# Altium PCB Mechanical-Keyboard.PcbDoc
Units mil, origin at the board's own origin, x right, y up, seen from the top; angles counter-clockwise.
Board outline 3009 x 4437 mil, 2 copper layers (Top Layer, Bottom Layer), stack 44.685 mil thick; 52 components, 40 nets, 184 pads, 253 vias.
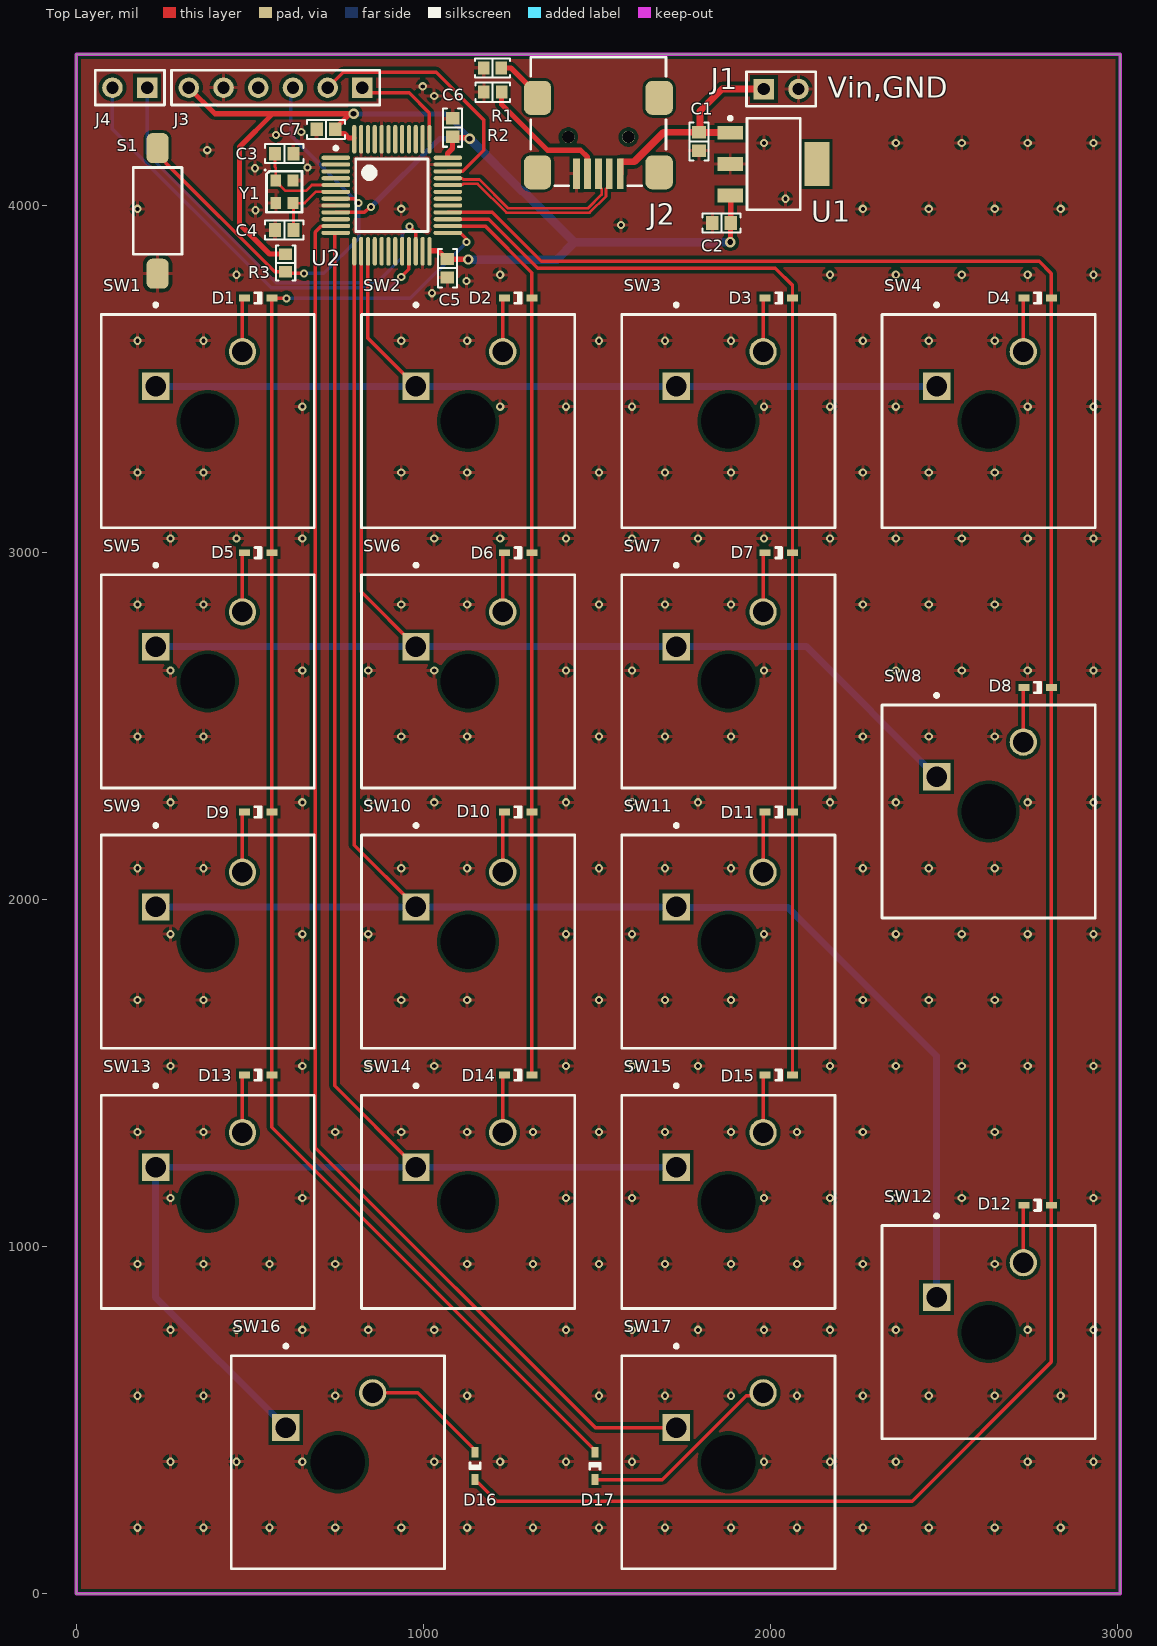
[diagram p0: Top Layer view]
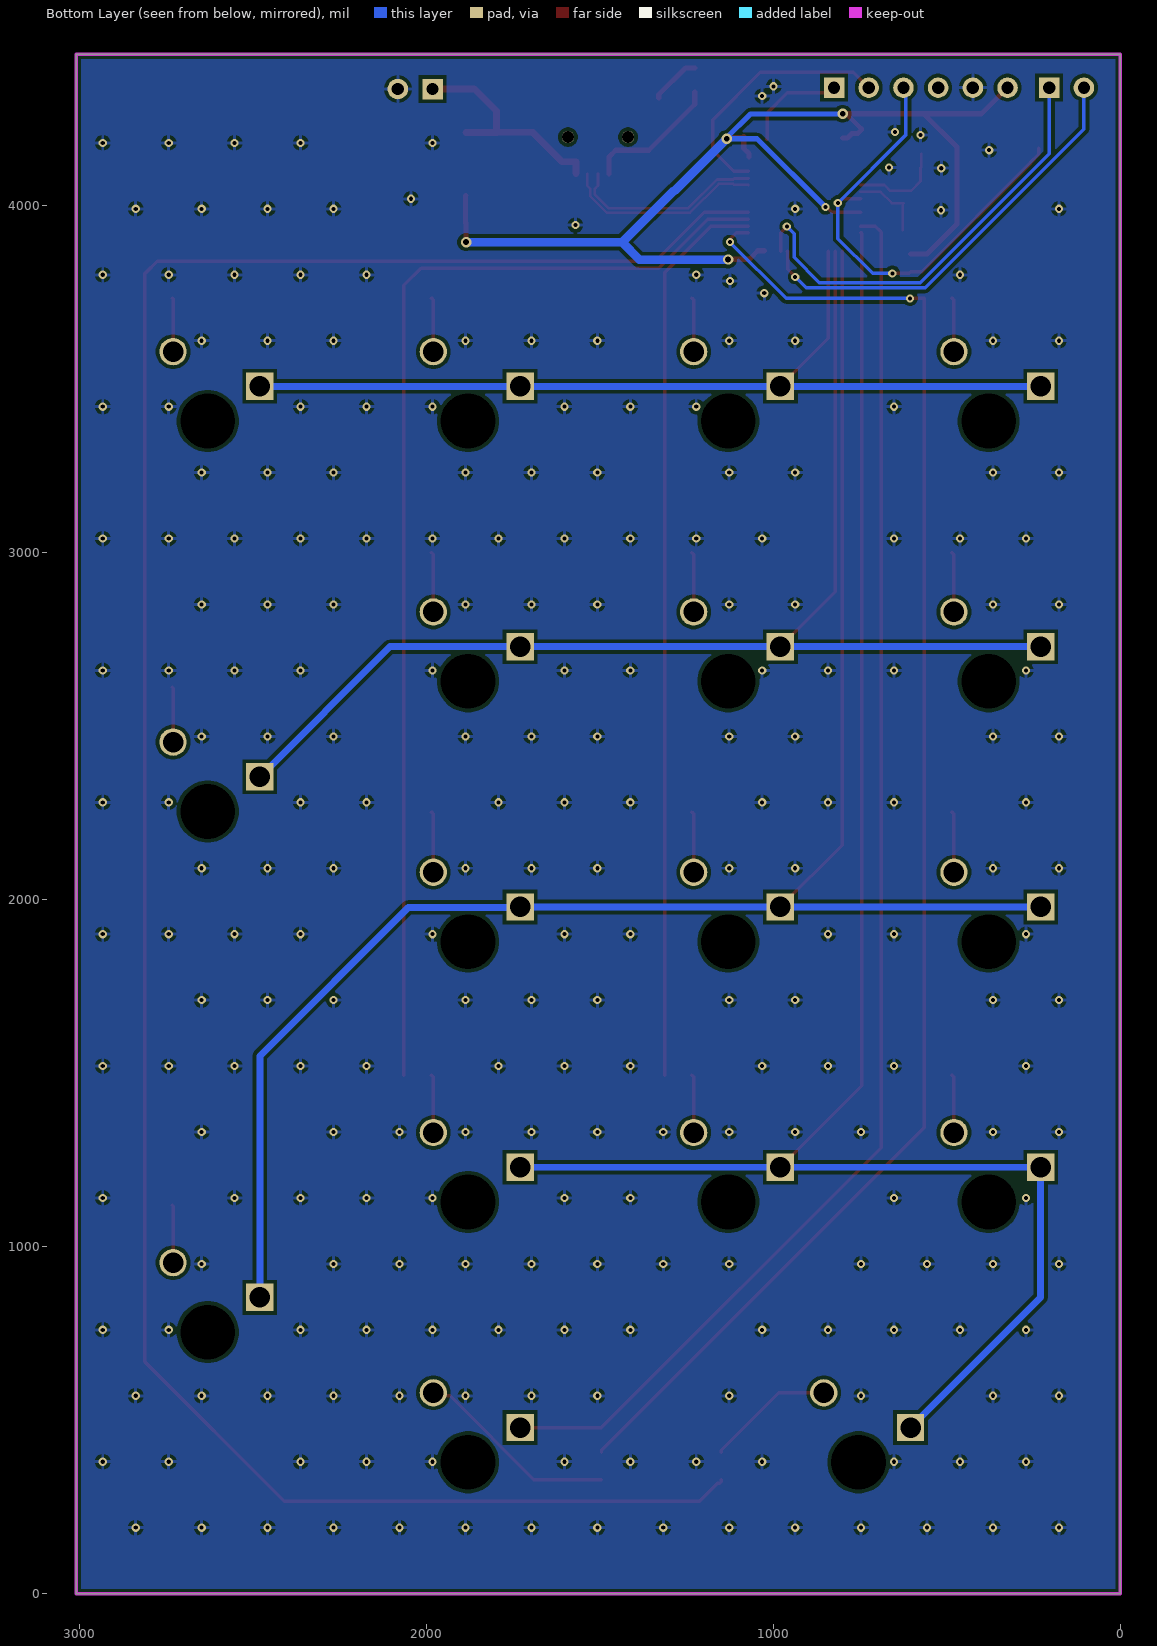
[diagram p1: Bottom Layer view, seen from below]
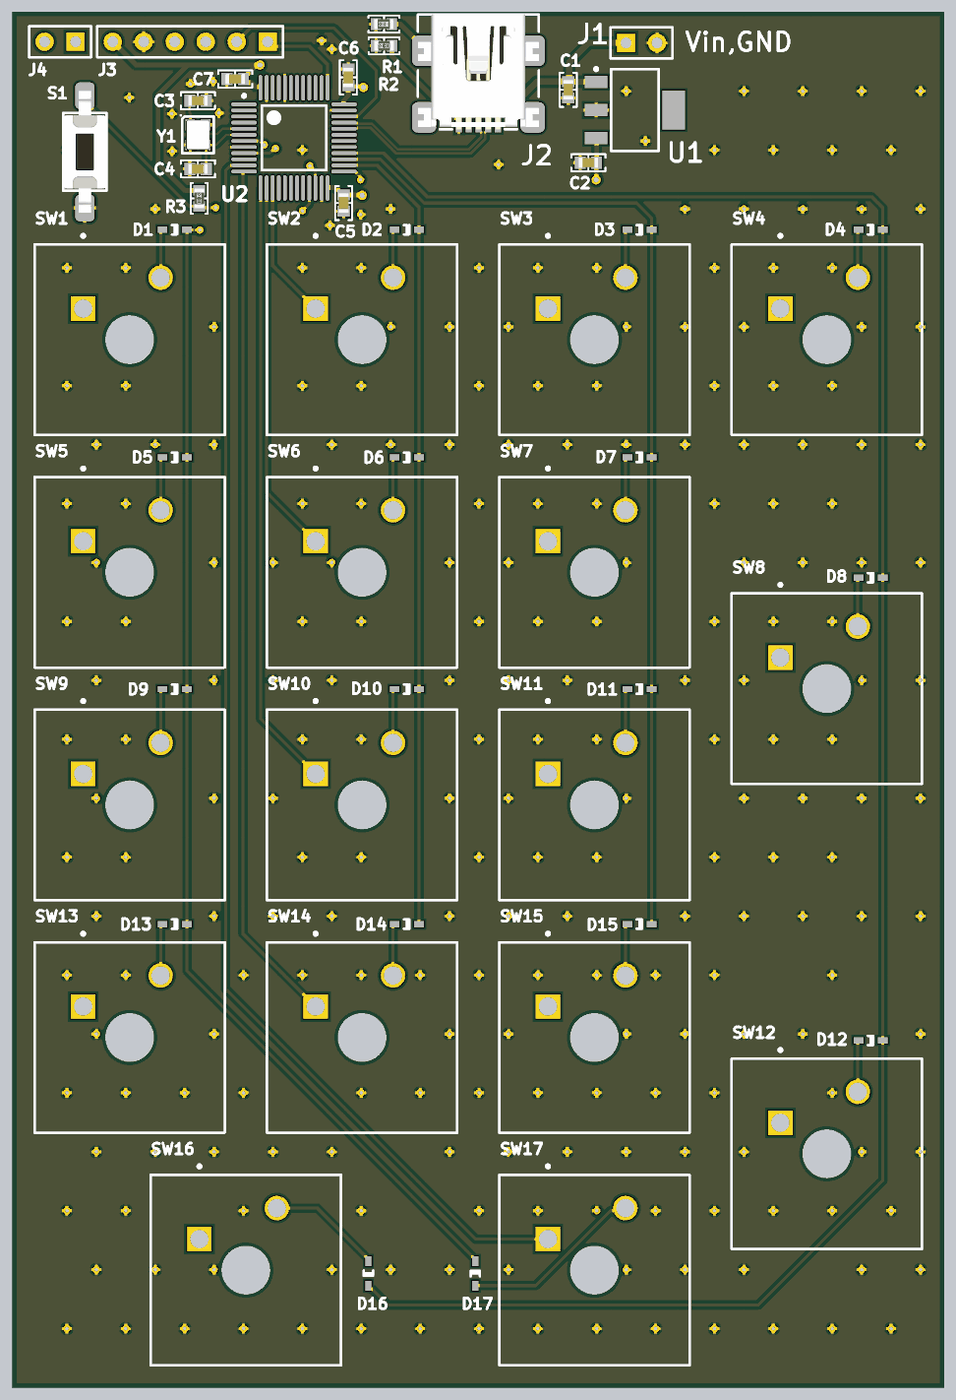
[diagram p2: 3D render of the assembled board from above, using the file's embedded part models]

## Layer stack, top to bottom
Top Solder: solder mask 0.8, Solder Resist, Dk 3.8
Top Layer: signal copper 1.378
Dielectric 1: dielectric 41.929, FR-4, Dk 4.8
Bottom Layer: signal copper 1.378
Bottom Solder: solder mask 0.8, Solder Resist, Dk 3.8

## Board outline
0,0 3009,0 3009,4437 0,4437

## Design rules (kind name [scope] priority, off if disabled: settings)
Clearance [All] p1: gap=10 ignorepadtopadclearanceinfootprint=FALSE except(0: Arc-Hole Track-Hole SMDPad-Hole THPad-Hole Via-Hole Fill-Hole Poly-Hole Region-Hole Text-Hole; 5: Arc-Arc Arc-Track Track-Track SMDPad-SMDPad; 7.87: Arc-SMDPad Track-SMDPad SMDPad-Fill SMDPad-Poly SMDPad-Region)
DiffPairsRouting USB_PHY [InDifferentialPairClass('USB_PHY')] p1: maxlimit=5 minlimit=5 mostfreqgap=5 toplayer_minwidth=7.71 toplayer_maxwidth=7.71 toplayer_prefwidth=7.71 bottomlayer_minwidth=7.71 bottomlayer_maxwidth=7.71 bottomlayer_prefwidth=7.71 impedanceprofiledriven=TRUE impedanceprofileid={DAAED7B1-7A43-4DDA-B76B-991709989FBB} maxuncoupledlength=500
DiffPairsRouting [All] p2: maxlimit=10 minlimit=10 mostfreqgap=10 toplayer_minwidth=4 toplayer_maxwidth=15 toplayer_prefwidth=15 bottomlayer_minwidth=4 bottomlayer_maxwidth=15 bottomlayer_prefwidth=15 maxuncoupledlength=500
PolygonConnect [All] p1: connectstyle=Relief reliefconductorwidth=10 reliefentries=4 polygonreliefangle="90 Angle" airgapwidth=10
RoutingVias [All] p1: holewidth=7.89 width=15.76 viastyle="Through Hole" minholewidth=7.87 minwidth=15.76 maxholewidth=28 maxwidth=50
SilkToSolderMaskClearance [IsPad] p1: minsilkscreentomaskgap=5.91 clearancetoexposedcopper=TRUE
SolderMaskExpansion [All] p1: expansion=4 istentingtop=FALSE
Width Microstrip [InNetClass('RF')] p1: maxlimit=11.6 minlimit=11.6 preferedwidth=11.6 impedanceprofiledriven=TRUE impedanceprofileid={7D405859-9D58-4392-8E80-BA888CAD5812} minimp=50.000000 maximp=50.000000 favimp=50.000000
Width [All] p2: maxlimit=30 minlimit=4 preferedwidth=15 toplayer_prefwidth=10 minimp=50.000000 maximp=50.000000 favimp=50.000000
28 further rules are at their usual default settings.

## Classes and differential pairs
differential pair class USB_PHY: USB_D
component class U_Power: C1 C2 U1
component class U_MCU: C3 C4 C5 C6 C7 R3 S1 U2 Y1
component class U_Key-Matrix: D1 D2 D3 D4 D5 D6 D7 D8 D9 D10 D11 D12 D13 D14 D15 D16 D17 SW1 SW2 SW3 SW4 SW5 SW6 SW7 SW8 SW9 SW10 SW11 SW12 SW13 SW14 SW15 SW16 SW17
component class Mechanical-Keyboard: J1 J2 J3 J4 R1 R2
differential pair USB_D: +USB_D_P -USB_D_N

## Components (designator, comment, footprint, x,y, rotation, side; value= is the part's Value field where it differs from the comment)
C1 "1uF" "CAP 0603_1608" 1795,4185 r90 top
C2 "1uF" "CAP 0603_1608" 1860,3950 r0 top
C3 "4pF" "CAP 0603_1608" 600,4150 r180 top
C4 "4pF" "CAP 0603_1608" 600,3930 r0 top
C5 "100nF" "CAP 0603_1608" 1070,3820 r90 top
C6 "100nF" "CAP 0603_1608" 1085,4225 r270 top
C7 "100nF" "CAP 0603_1608" 720,4220 r0 top
D1 "1N4148WT" FAIR-SOD-523F-2_V 525,3734 r180 top
D2 "1N4148WT" FAIR-SOD-523F-2_V 1274,3734 r180 top
D3 "1N4148WT" FAIR-SOD-523F-2_V 2025,3734 r180 top
D4 "1N4148WT" FAIR-SOD-523F-2_V 2771,3734 r180 top
D5 "1N4148WT" FAIR-SOD-523F-2_V 525,3000 r180 top
D6 "1N4148WT" FAIR-SOD-523F-2_V 1274,3000 r180 top
D7 "1N4148WT" FAIR-SOD-523F-2_V 2025,3000 r180 top
D8 "1N4148WT" FAIR-SOD-523F-2_V 2771,2612 r180 top
D9 "1N4148WT" FAIR-SOD-523F-2_V 525,2253 r180 top
D10 "1N4148WT" FAIR-SOD-523F-2_V 1274,2253 r180 top
D11 "1N4148WT" FAIR-SOD-523F-2_V 2025,2253 r180 top
D12 "1N4148WT" FAIR-SOD-523F-2_V 2771,1120 r180 top
D13 "1N4148WT" FAIR-SOD-523F-2_V 525,1495 r180 top
D14 "1N4148WT" FAIR-SOD-523F-2_V 1274,1495 r180 top
D15 "1N4148WT" FAIR-SOD-523F-2_V 2025,1495 r180 top
D16 "1N4148WT" FAIR-SOD-523F-2_V 1150,369 r90 top
D17 "1N4148WT" FAIR-SOD-523F-2_V 1495,369 r270 top
J1 "2 Pin" HDR1X2 1981.69,4336.26 r0 top
J2 "USB Micro" "FCI USB 10033526-N3212LF" 1505,4243 r0 top locked
J3 "6 Pin" HDR1X6 825,4340 r180 top
J4 "2 Pin" HDR1X2 205,4340 r180 top
R1 "DNP" "RES 0603_1608" 1200.59,4327 r180 top
R2 "DNP" "RES 0603_1608" 1200,4397 r180 top
R3 "10k" "RES 0603_1608" 604,3835 r90 top
S1 "SPST-NO" "TE FSMSMTR" 235,3985 r0 top
SW1 "MX1A-11NN" CHRY-MX1A-11NN_V 379.51,3379.51 r0 top locked
SW2 "MX1A-11NN" CHRY-MX1A-11NN_V 1129.51,3379.51 r0 top locked
SW3 "MX1A-11NN" CHRY-MX1A-11NN_V 1879.51,3379.51 r0 top locked
SW4 "MX1A-11NN" CHRY-MX1A-11NN_V 2629.51,3379.51 r0 top locked
SW5 "MX1A-11NN" CHRY-MX1A-11NN_V 379.51,2629.51 r0 top locked
SW6 "MX1A-11NN" CHRY-MX1A-11NN_V 1129.51,2629.51 r0 top locked
SW7 "MX1A-11NN" CHRY-MX1A-11NN_V 1879.51,2629.51 r0 top locked
SW8 "MX1A-11NN" CHRY-MX1A-11NN_V 2629.51,2254.51 r0 top locked
SW9 "MX1A-11NN" CHRY-MX1A-11NN_V 379.51,1879.51 r0 top locked
SW10 "MX1A-11NN" CHRY-MX1A-11NN_V 1129.51,1879.51 r0 top locked
SW11 "MX1A-11NN" CHRY-MX1A-11NN_V 1879.51,1879.51 r0 top locked
SW12 "MX1A-11NN" CHRY-MX1A-11NN_V 2629.51,754.51 r0 top locked
SW13 "MX1A-11NN" CHRY-MX1A-11NN_V 379.51,1129.51 r0 top locked
SW14 "MX1A-11NN" CHRY-MX1A-11NN_V 1129.51,1129.51 r0 top
SW15 "MX1A-11NN" CHRY-MX1A-11NN_V 1879.51,1129.51 r0 top locked
SW16 "MX1A-11NN" CHRY-MX1A-11NN_V 754.51,379.51 r0 top locked
SW17 "MX1A-11NN" CHRY-MX1A-11NN_V 1879.51,379.51 r0 top locked
U1 "MCP1703A-3302E/DB" MCHP-SOT-223-DB3_N 2010,4120 r0 top
U2 "STM32L151C6T6" STM-LQFP48_M 910,4030 r0 top
Y1 "24MHz" "ABRACON ABM10" 600,4040 r270 top

## Footprints (in the part's own frame and the unit in brackets; to place one, negate y for a bottom-side part, rotate by r counter-clockwise, add the part's x,y. Pads: shape width x height; smd on the part's side, far side on the other; paste and mask are expansions set on the pad)
"ABRACON ABM10" [mm] "Crystal, 4-Leads, Body 2.00x2.45mm, Pitch 1.65mm, IPC Medium Density"
  rect 0.9x0.8 smd: 1(-0.825,-0.625) 2(0.825,-0.625) 3(0.825,0.625) 4(-0.825,0.625)
  silkscreen extent -1.65,-1.45 1.5,1.3, body extent -1.27,-1.02 1.28,1.03, height 0.5
"CAP 0603_1608" [mm] "Chip Capacitor, 2-Leads, Body 1.60x0.80mm, IPC Medium Density"
  rect 0.9x1 smd: 1(-0.675,0) 2(0.675,0)
  silkscreen extent -1.4,-0.7 1.4,0.7, body extent -0.8,-0.41 0.8,0.41, height 0.82
CHRY-MX1A-11NN_V [mm] "Switch, 2-Leads, Body 15.6x15.6mm"
  rect 2x2 hole 1.5 paste+0: 1(-3.81,2.54)
  round 2 hole 1.5 paste+0: 2(2.54,5.08)
  round 0 hole 4 unplated paste+0: MH1(0,0)
  silkscreen extent -7.8,-7.8 7.8,8.62, body extent -7.8,-7.8 7.8,7.8, height 15.2
FAIR-SOD-523F-2_V [mm] "SMD, 2-Leads, Body 1.2x0.8mm, Height 0.7mm"
  rect 0.8x0.5 smd: 1(-1,0) 2(1,0)
  silkscreen extent -0.2,-0.38 0.24,0.38, body extent -0.6,-0.4 0.6,0.4, height 0.71
"FCI USB 10033526-N3212LF" [mm] "USB 2.0 Type B Mini"
  rect 0.5x2.25 smd: 1(1.6,-3.826) 2(0.8,-3.826) 3(0,-3.826) 4(-0.8,-3.826) 5(-1.6,-3.826)
  round 0.9 hole 0.9 unplated: M(-2.2,-1.151) M(2.2,-1.151)
  rrect50% 2x2.5 smd: S(-4.45,-3.731) S(-4.45,1.719) S(4.45,-3.731) S(4.45,1.719)
  silkscreen extent -4.95,-4.71 4.95,4.69, body extent -4.95,-4.7 4.95,4.7, height 4.01
HDR1X2 [mm] "Connector; Header; 2 Position"
  rect 1.5x1.5 hole 0.9: 1(0,0)
  round 1.5 hole 0.9: 2(2.54,0)
  silkscreen extent -1.27,-1.27 3.81,1.27
HDR1X6 [mm] "Connector; Header; 6 Position"
  rect 1.5x1.5 hole 0.9: 1(0,0)
  round 1.5 hole 0.9: 2(2.54,0) 3(5.08,0) 4(7.62,0) 5(10.16,0) 6(12.7,0)
  silkscreen extent -1.27,-1.27 13.97,1.27
MCHP-SOT-223-DB3_N [mm] "SOT223, 3-Leads, Body 6.5x3.5mm, Pitch 2.3mm, IPC Medium Density"
  rect 1.85x1 smd: 1(-3.175,2.3) 2(-3.175,0) 3(-3.175,-2.3)
  rect 1.85x3.2 smd: 4(3.175,0)
  silkscreen extent -3.3,-3.35 1.95,3.47, body extent -1.85,-3.35 1.85,3.35, height 1.8
"RES 0603_1608" [mm] "Chip Resistor, 2-Leads, Body 1.60x0.80mm, IPC Medium Density"
  rect 0.85x0.95 smd: 1(-0.65,0) 2(0.65,0)
  silkscreen extent -1.27,-0.7 1.27,0.7, body extent -0.8,-0.4 0.8,0.4, height 0.45
STM-LQFP48_M [mm] "QFP, 48-Leads, Body 7x7mm, Pitch 0.5mm, IPC Low Density"
  oval 2.1x0.3 smd: 1(-4.1,2.75) 2(-4.1,2.25) 3(-4.1,1.75) 4(-4.1,1.25) 5(-4.1,0.75) 6(-4.1,0.25) 7(-4.1,-0.25) 8(-4.1,-0.75) 9(-4.1,-1.25) 10(-4.1,-1.75) 11(-4.1,-2.25) 12(-4.1,-2.75) 25(4.1,-2.75) 26(4.1,-2.25) 27(4.1,-1.75) 28(4.1,-1.25) 29(4.1,-0.75) 30(4.1,-0.25) 31(4.1,0.25) 32(4.1,0.75) 33(4.1,1.25) 34(4.1,1.75) 35(4.1,2.25) 36(4.1,2.75)
  oval 0.3x2.1 smd: 13(-2.75,-4.1) 14(-2.25,-4.1) 15(-1.75,-4.1) 16(-1.25,-4.1) 17(-0.75,-4.1) 18(-0.25,-4.1) 19(0.25,-4.1) 20(0.75,-4.1) 21(1.25,-4.1) 22(1.75,-4.1) 23(2.25,-4.1) 24(2.75,-4.1) 37(2.75,4.1) 38(2.25,4.1) 39(1.75,4.1) 40(1.25,4.1) 41(0.75,4.1) 42(0.25,4.1) 43(-0.25,4.1) 44(-0.75,4.1) 45(-1.25,4.1) 46(-1.75,4.1) 47(-2.25,4.1) 48(-2.75,4.1)
  silkscreen extent -4.22,-2.65 2.65,3.57, body extent -3.5,-3.5 3.5,3.5, height 1.6
"TE FSMSMTR" [mm]
  rrect50% 1.6x2.19 smd: 1(0,4.595) 2(0,-4.595)
  silkscreen extent -1.78,-3.17 1.78,3.17, body extent -1.75,-4.98 1.75,4.98, height 4.42

## Part data
C1 C2 C3 C4 C5 C6 C7: library part Capacitor, "SMT Capacitor"
D1 D2 D3 D4 D5 D6 D7 D8 D9 D10 D11 D12 D13 D14 D15 D16 D17: library part CMP-0881-00001-1, "High Conductance Fast Switching Diode, 75 V, -55 to 150 degC, 2-Pin SOD523F, RoHS", Manufacturer="Fairchild Semiconductor", Temperature Range="-55 to 150 degC", BVR (IR="5 uA)=75 V Min.", CO="4 pF Max.", ComponentLink1Description="Manufacturer URL", ComponentLink1URL=http://www.fairchildsemi.com/, ComponentLink2Description=Datasheet, ComponentLink2URL=http://www.fairchildsemi.com/ds/1N/1N4148WT.pdf, DatasheetVersion="Rev. A2", IR (VR="75 V)=5 uA Max.", Mounting Technology="Surface Mount", PackageDescription="2-Pin Surface Mount Device, Body 1.2 x 0.8 mm, Height 0.7 mm", PackageReference=SOD-523F-2, PartNumber=1N4148WT, RoHS=TRUE, VF="1 V Max."
J2: library part "USB 2.0 Type B Micro"
R1 R2 R3: library part Resistor, "SMT Resistor"
S1: library part "SPST-NO 2 PIN"
SW1 SW2 SW3 SW4 SW5 SW6 SW7 SW8 SW9 SW10 SW11 SW12 SW13 SW14 SW15 SW16 SW17: library part CMP-2000-06785-1, "Keymodule MX, SPST, IP40, 12 V Max, 10 mA Max, -10 to 70 degC, 2-Pin THD, RoHS, Bulk", Actuator Color=N/A, Illumination Color=N/R, Manufacturer=Cherry, Maximum AC Voltage Rating=12V, Maximum Contact Resistance=200mOhm, Maximum Current Rating=0.01A, Minimum Insulation Resistance=100MOhm, Operating Force=0.58N, Operating Temperature=-10to70C, Package Description="2-Pin Through Hole Switch, Body 15.6 x 15.6 mm", Part No=MX1A11NN, Actuator Length=3.6mm, Actuator Material=N/A, Actuator Style=Button, Body Orientation=Straight, Contact Material=Silver/Gold, Contact Plating=N/A, Datasheet URL=http://www.cherry.de/PDF/EN_CHERRY_MX1A-1xxx.pdf, Datasheet Version=02/2016, Dielectric Strength=N/A, Dimension=15.6x15.6x15.2mm, ECCN=EAR99, Electrical Life=50000000Cycles, Family=MX, Housing Material=N/A, HTS=8536509065, Illumination Type=N/R, IP Rating=N/A, Manufacturer URL=http://cherryswitches.com/cn/, Maximum DC Voltage Rating=12V, Maximum Power Rating=N/A, Mechanical Life=N/A, Mounting=ThroughHole, Mounting Technology=ThroughHole, Number of Terminals=2, Operating Speed=N/A, Package Reference=MX1A-11NN, Package URL=http://cherryamericas.com/wp-content/uploads/2014/12/mx_cat.pdf, Packaging=N/A, Pole Throw Configuration=SPST, RoHS=Unknown, Row Spacing=6.35mm, Supplier=CherryElectrical, Switch Configuration=N.O., Terminal Pitch=2.54mm, Terminal Type=PCPins, Total Travel=4.06mm, Type=DesktopProfile
U1: library part CMP-0136-01118-1, "250 mA, 16 V, Low Quiescent Current LDO Regulator, -40 to 125 degC, 3-pin SOT-223 (DB3), Tube", Manufacturer=Microchip, ComponentLink1Description="Manufacturer URL", ComponentLink1URL=http://www.microchip.com, ComponentLink2Description=Datasheet, ComponentLink2URL=http://ww1.microchip.com/downloads/en/DeviceDoc/25122A.pdf, ComponentLink3Description="Package Specification", ComponentLink3URL=http://www.microchip.com/stellent/groups/techpub_sg/documents/packagingspec/en012702.pdf, ComponentLink4Description="Product URL", ComponentLink4URL=http://www.microchip.com/MCP1703A, DatasheetVersion="Rev. A", Mounting Technology="Surface Mount", PackageDescription="3-Lead Plastic Small Outline Transistor, 6.5 x 3.5 mm Body, 2.3 mm Pitch", PackageReference=SOT-223-DB3, PackageVersion=C04-032B, PartNumber=MCP1703A-3302E/DB
U2: library part CMP-0236-00051-2, "ARM Cortex-M3 32-bit MCU, 32 KB Flash, 10 KB Internal RAM, 37 I/Os, 48-pin LQFP, -40 to 85 degC, Tray", I/Os (High Current)=37, Operating Frequency(F) (Processor speed) (MHz)=32, Supply Voltage(Vcc) min (V)=1.65, ComponentLink1Description="Manufacturer URL", ComponentLink1URL=http://www.st.com/web/en/home.html, ComponentLink2Description=Datasheet, ComponentLink2URL=http://www.st.com/st-web-ui/static/active/en/resource/technical/document/datasheet/CD00277537.pdf, ComponentLink3Description="Package Specification", ComponentLink3URL=http://www.st.com/st-web-ui/static/active/en/resource/technical/document/datasheet/DM00058181.pdf, Core="ARM Cortex-M3", D/A Converter="2x12-bit (2 Channel)", Data E2PROM nom (B)=4096, DatasheetVersion="Rev. 8", FLASH Size (Prog) (kB)=32, Internal RAM Size (kB)=10, Mounting Technology="Surface Mount", PackageDescription="48-Pin Low Profile Quad Flat Package, 7 x 7 mm Body, 0.5 mm Pitch", PackageReference=LQFP48, PackageVersion="Rev. 6, 06/2013", Packing=Tray, PartNumber=STM32L151C6T6
Y1: library part CMP-2000-05726-1, "Low Profile Crystal, 8.0 MHz, +/- 30 ppm, -20 to 70 degC, 2-Pin SMD, RoHS, Tape and Reel", Case Height=4.2mm, Case Length=11.4mm, Case Width=4.7mm, Frequency=8MHz, Frequency Stability=50PPM, Load Capacitance=18pF, Manufacturer=ABRACON, Operating Temperature Range=-20Cto+70C, Package / Case=HC-49/US, Package Description="2-Pin Surface Mount Device, Body 11.4 x 4.7 mm", Package Reference=ABLS-14.7456MHZ-B2-T, Tolerance=30PPM, Brand=ABRACON, Datasheet URL=http://www.abracon.com/Resonators/abls.pdf, Datasheet Version=04/2011, Dimensions=4.7mmWx11.4mmLx4.2mmH, ESR=80Ohms, Factory Pack Quantity=1000, Manufacturer URL=http://www.abracon.com/, Mounting Style=SMD/SMT, Mounting Technology=SurfaceMount, Package URL=http://www.abracon.com/Support/PackageDrawing/Resonators/ABLS-2D.pdf, Packaging=Reel, Product Category=Crystals, RoHS=Details, Series=ABLS, Termination Style=SMD/SMT, Type=LowProfileMicroprocessorCrystal

## Via types
v1: diameter 23.62, hole 11.81, Top Layer to Bottom Layer, 249 vias
v2: diameter 30, hole 17, Top Layer to Bottom Layer, 4 vias

## Nets (pads, with @x,y where several pads share a name; then routed paths per layer and width w, separated by ;. In a path a pad name is that pad's centre, name@x,y a point inside that pad or via, vN(x,y) a via of type N, cw(c..) or ccw(c..) an arc to the next point about the centre after c; other vN are vias at no path point)
Col0: D1.1 D5.1 D9.1 D13.1 D17.1 U2.25 | length 4408.9
  Top Layer w10: v1(606,3733) 605.5,3733.5 564.87,3733.5 D1.1 D5.1 D9.1 D13.1 564.37,1344.91 1495,414.28 D17.1 ; U2.25 1106.85,3921.73 1122.39,3906.19 1122.39,3897.61 v1(1125,3895)
  Bottom Layer w10: v1(606,3733) 963,3733 v1(1125,3895)
Col1: D2.1 D6.1 D10.1 D14.1 U2.26 | length 2609.4
  Top Layer w10: U2.26 1178.58,3941.42 1313.37,3806.63 D2.1 D6.1 D10.1 D14.1
Col2: D3.1 D7.1 D11.1 D15.1 U2.27 | length 3347.5
  Top Layer w10: U2.27 1188.9,3961.1 1330,3820 2015,3820 2064.37,3770.63 D3.1 D7.1 D11.1 D15.1
Col3: D4.1 D8.1 D12.1 D16.1 U2.28 | length 6804.2
  Top Layer w10: U2.28 1199.21,3980.79 1340,3840 2775,3840 2810.37,3804.63 D4.1 D8.1 D12.1 2810.37,668.37 2409,267 1212.63,267 1160.75,318.88 1154.84,318.88 1150,323.72 D16.1
GND: C1.1 C2.1 C3.1 C4.1 C5.1 C6.1 C7.1 J1.2 J2.5 J3.5 R1.2 R2.2 S1.2 U1.2 U2.8 U2.23 U2.35 U2.44 U2.47 Y1.2 Y1.4
  other v1: 177,191 367,191 557,191 747,191 937,191 1127,191 1317,191 1507,191 1697,191 1887,191 2077,191 2267,191 2457,191 2647,191 2837,191 272,381 462,381 652,381 1032,381 1222,381 1412,381 1602,381 1982,381 2172,381 2362,381 2742,381 2932,381 177,571 367,571 747,571 1127,571 1507,571 1697,571 1887,571 2077,571 2267,571 2457,571 2647,571 2837,571 272,761 462,761 652,761 842,761 1032,761 1412,761 1602,761 1792,761 1982,761 2172,761 2362,761 2742,761 2932,761 177,951 367,951 557,951 747,951 1127,951 1317,951 1507,951 1697,951 1887,951 2077,951 2267,951 2647,951 272,1141 652,1141 1412,1141 1602,1141 1982,1141 2172,1141 2362,1141 2552,1141 2932,1141 177,1331 367,1331 747,1331 937,1331 1127,1331 1317,1331 1507,1331 1697,1331 1887,1331 2077,1331 2267,1331 2647,1331 272,1521 652,1521 842,1521 1032,1521 1412,1521 1602,1521 1792,1521 2172,1521 2362,1521 2552,1521 2742,1521 2932,1521 177,1711 367,1711 937,1711 1127,1711 1507,1711 1697,1711 1887,1711 2267,1711 2457,1711 2647,1711 272,1901 652,1901 842,1901 1412,1901 1602,1901 1982,1901 2362,1901 2552,1901 2742,1901 2932,1901 177,2091 367,2091 937,2091 1127,2091 1507,2091 1697,2091 1887,2091 2267,2091 2457,2091 2647,2091 272,2281 652,2281 842,2281 1032,2281 1412,2281 1602,2281 1792,2281 2172,2281 2362,2281 2742,2281 2932,2281 177,2471 367,2471 937,2471 1127,2471 1507,2471 1697,2471 1887,2471 2267,2471 2457,2471 2647,2471 272,2661 652,2661 842,2661 1032,2661 1412,2661 1602,2661 1982,2661 2362,2661 2552,2661 2742,2661 2932,2661 177,2851 367,2851 937,2851 1127,2851 1507,2851 1697,2851 1887,2851 2267,2851 2457,2851 2647,2851 272,3041 462,3041 652,3041 1032,3041 1222,3041 1412,3041 1602,3041 1792,3041 1982,3041 2172,3041 2362,3041 2552,3041 2742,3041 2932,3041 177,3231 367,3231 937,3231 1127,3231 1507,3231 1697,3231 1887,3231 2267,3231 2457,3231 2647,3231 652,3421 1222,3421 1412,3421 1602,3421 1982,3421 2172,3421 2362,3421 2742,3421 2932,3421 177,3611 367,3611 937,3611 1127,3611 1507,3611 1697,3611 1887,3611 2267,3611 2457,3611 2647,3611 1026,3748 1125,3783 462,3801 1222,3801 2172,3801 2362,3801 2552,3801 2742,3801 2932,3801 1570,3944 517,3987 177,3991 937,3991 2267,3991 2457,3991 2647,3991 2837,3991 2044,4020 516,4108 667,4110 378,4160 1982,4181 2362,4181 2552,4181 2742,4181 2932,4181 576,4204 649,4212 1032,4316 999,4344
NetC1_2: C1.2 J1.1 J2.1 U1.1 | length 659.4
  Top Layer w20: J2.1 1567.99,4126.5 1568.15,4126.66 1608.42,4126.66 1693.33,4211.57 C1.2 ; U1.1 1884.49,4211.06 1795.51,4211.06 C1.2 ; J1.1 1861.26,4336.26 1798,4273 1798,4214.57 C1.2
NetD1_2: D1.2 SW1.2 | length 157.8
  Top Layer w10: SW1.2 479.51,3729.16 484.35,3734 D1.2
NetD2_2: D2.2 SW2.2 | length 156.8
  Top Layer w10: SW2.2 1229.51,3729.16 1234.35,3734 D2.2
NetD3_2: D3.2 SW3.2 | length 157.8
  Top Layer w10: SW3.2 1979.51,3729.16 1984.35,3734 D3.2
NetD4_2: D4.2 SW4.2 | length 155.4
  Top Layer w10: SW4.2 2729.51,3731.88 D4.2
NetD5_2: D5.2 SW5.2 | length 173.8
  Top Layer w10: SW5.2 479.51,2995.16 484.35,3000 D5.2
NetD6_2: D6.2 SW6.2 | length 172.8
  Top Layer w10: SW6.2 1229.51,2995.16 1234.35,3000 D6.2
NetD7_2: D7.2 SW7.2 | length 173.8
  Top Layer w10: SW7.2 1979.51,2995.16 1984.35,3000 D7.2
NetD8_2: D8.2 SW8.2 | length 158.4
  Top Layer w10: SW8.2 2729.51,2609.88 D8.2
NetD9_2: D9.2 SW9.2 | length 176.8
  Top Layer w10: SW9.2 479.51,2248.16 484.35,2253 D9.2
NetD10_2: D10.2 SW10.2 | length 175.8
  Top Layer w10: SW10.2 1229.51,2248.16 1234.35,2253 D10.2
NetD11_2: D11.2 SW11.2 | length 176.8
  Top Layer w10: SW11.2 1979.51,2248.16 1984.35,2253 D11.2
NetD12_2: D12.2 SW12.2 | length 166.4
  Top Layer w10: SW12.2 2729.51,1117.88 D12.2
NetD13_2: D13.2 SW13.2 | length 168.8
  Top Layer w10: SW13.2 479.51,1490.16 484.35,1495 D13.2
NetD14_2: D14.2 SW14.2 | length 167.8
  Top Layer w10: SW14.2 1229.51,1490.16 1234.35,1495 D14.2
NetD15_2: D15.2 SW15.2 | length 168.8
  Top Layer w10: SW15.2 1979.51,1490.16 1984.35,1495 D15.2
NetD16_2: D16.2 SW16.2 | length 369.8
  Top Layer w10: SW16.2 984.77,579.51 1150,414.28 D16.2
NetD17_2: D17.2 SW17.2 | length 588
  Top Layer w10: D17.2 1689.63,329.63 1931.06,571.06 1971.06,571.06 SW17.2
NetJ2_4: J2.4 R1.1 | length 392.8
  Top Layer w15: R1.1 1226.18,4292.49 1358.7,4159.97 1453.82,4159.97 1473.35,4140.44 1473.35,4092.53 J2.4
NetJ2_S: J2.S R2.1 | length 145.7
  Top Layer w15: R2.1 1253.32,4397 1329.8,4320.52 J2.S@1329.8,4310.68
PH0: C3.2 U2.5 Y1.1 | length 272
  Top Layer w7.71: C3.2 573.43,4111.43 575.78,4109.08 575.78,4072.87 Y1.1 575.39,4070.51 602.87,4043.04 663.04,4043.04 679.53,4059.53 U2.5
PH1: C4.2 U2.6 Y1.3 | length 215.7
  Top Layer w7.71: C4.2 626.57,4005.55 Y1.3 658.11,4007.52 690.43,4039.84 U2.6
Row0: SW1.1 SW2.1 SW3.1 SW4.1 U2.15 | length 2696.4
  Top Layer w10: U2.15 841.1,3617.91 SW2.1
  Bottom Layer w20: SW1.1 SW2.1 SW3.1 SW4.1
Row1: SW5.1 SW6.1 SW7.1 SW8.1 U2.14 | length 3609.9
  Top Layer w10: U2.14 821.42,2887.6 SW6.1
  Bottom Layer w20: SW5.1 SW6.1 SW7.1 2104.51,2729.51 SW8.1
Row2: SW9.1 SW10.1 SW11.1 SW12.1 U2.13 | length 5087.1
  Top Layer w10: U2.13 801.73,2157.28 SW10.1
  Bottom Layer w10: SW9.1 SW9.1@230,1980
  Bottom Layer w20: SW9.1 SW10.1 SW11.1 1730.77,1978.25 2051.75,1978.25 2479.51,1550.49 SW12.1
Row3: SW13.1 SW14.1 SW15.1 SW16.1 U2.12 | length 5197.8
  Top Layer w10: U2.12 745.84,3921.73 745,3920.9 745,1464.02 SW14.1
  Bottom Layer w20: SW16.1 229.51,854.51 SW13.1 SW14.1 SW15.1
Row4: SW17.1 U2.11 | length 4079.4
  Top Layer w10: U2.11 748.24,3941.07 705.93,3941.07 689,3924.14 689,1286 1495.49,479.51 SW17.1
RST: J3.3 R3.1 S1.1 U2.7 | length 1370.9
  Top Layer w10: S1.1 235,4148.47 258.84,4124.63 258.84,4123.16 572.59,3809.41 R3.1 608.41,3805 v1(657,3805) ; U2.7 801.85,4020.16 814,4008.01 v1(814,4007.6)
  Bottom Layer w10: J3.3 618,4333 618,4203.6 v1(814,4007.6) 814,3905 714,3805 v1(657,3805)
SWCLK: J3.1 U2.37 | length 298.9
  Top Layer w10: J3.1 840,4325 960,4325 1017.92,4267.08 1017.92,4191.76 U2.37
SWDIO: J3.2 U2.34 | length 741.2
  Top Layer w10: J3.2 769.53,4384.53 1037.47,4384.53 1175,4247 1175,4160.17 1114.07,4099.24 1071.76,4099.24 U2.34
USART3_RX: J4.1 U2.22 | length 1285.7
  Top Layer w10: v1(961,3940) 978.9,3922.1 U2.22
  Bottom Layer w10: J4.1 205,4150 576.81,3778.19 867.19,3778.19 940,3851 940,3919 v1(961,3940)
USART3_TX: J4.2 U2.21 | length 1236.7
  Top Layer w10: v1(937,3795) 958.87,3816.87 958.87,3868.24 U2.21
  Bottom Layer w10: J4.2 105,4220.79 562.6,3763.19 905.19,3763.19 v1(937,3795)
USB_D_N: J2.2 U2.32 | length 580.2
  Top Layer w7.71: U2.32 1072.2,4060.31 1112.89,4060.31 1115.59,4063.02 1156.98,4063.02 1240,3980 1480,3980 1527.1,4027.1 1527.1,4048.53 1536.5,4057.92 J2.2
USB_D_P: J2.3 U2.33 | length 559.1
  Top Layer w7.71: U2.33 1072.2,4078.43 1112.89,4078.43 1115.59,4075.72 1162.25,4075.72 1245.26,3992.71 1474.74,3992.71 1514.39,4032.36 1514.39,4048.53 1505,4057.92 J2.3
Vdd: C2.2 C5.2 C6.2 C7.2 J3.6 R3.2 U1.3 U2.9 U2.24 U2.36 U2.48 | length 3563.6
  Top Layer w10: U2.9 831.1,3980.79 846.31,3996 v1(850,3996)
  Top Layer w15: J3.6 400,4265 567,4265 ; R3.2 557.41,3860.59 471,3947 471,4169 567,4265 ; v2@786.74,4262.13 746.57,4221.97 C7.2 746.57,4218.03 756.79,4207.81 773.19,4207.81 786,4195 U2.48@800,4195 ; v2(800,4265) 786.74,4265 567,4265 ; 1025,3870 1044.61,3870 1068.03,3846.57 C5.2 1070.79,3845.79 1129.21,3845.79 v2(1130,3845) ; U2.36@1070,4140 1070,4150 1085,4165 1085,4192.87 C6.2 1087.71,4195.71 1131.29,4195.71 v2(1134,4193) ; v2(1885,3895) 1885.79,3895.79 1885.79,3949.21 C2.2 1886.57,4027.87 U1.3
  Bottom Layer w10: v2(800,4265) v2@800.45,4264.55
  Bottom Layer w15: J3.6 J3.6@325.11,4340 ; v2@800.45,4264.55 1065.55,4264.55 1134,4196.11 v2(1134,4193) 1047,4193 v1(850,3996)
  Bottom Layer w25: v2(1130,3845) 1130.45,3844.55 1385.55,3844.55 1435.55,3894.55 ; v2(1134,4193) 1283.7,4043.3 1286.81,4043.3 1435.55,3894.55 ; v2(1885,3895) 1884.55,3894.55 1435.55,3894.55
pads on no net: J2.M J3.4 SW1.MH1 SW2.MH1 SW3.MH1 SW4.MH1 SW5.MH1 SW6.MH1 SW7.MH1 SW8.MH1 SW9.MH1 SW10.MH1 SW11.MH1 SW12.MH1 SW13.MH1 SW14.MH1 SW15.MH1 SW16.MH1 SW17.MH1 U1.4 U2.1 U2.2 U2.3 U2.4 U2.10 U2.16 U2.17 U2.18 U2.19 U2.20 U2.29 U2.30 U2.31 U2.38 U2.39 U2.40 U2.41 U2.42 U2.43 U2.45 U2.46

## Polygon pours and split planes (outlines as drawn)
GND on Bottom Layer "NONET_L-01_P-001" (solid, pour order 1): 0,0 0,4437 3009,4437 3009,0
GND on Top Layer "NONET_L-01_P-001" (solid, remove dead copper, pour order 0): 0,0 0,4437 3009,4437 3009,0

## Keep-outs
Keep-Out Layer:
  the board outline again, w10

## Silkscreen, mask and mechanical layers (free items; w line width, h text height)
Top Overlay:
  text "Vin,GND" at 2166,4310.99 h60